# EAGLE board ShiftIn (EAGLE 9.6.2)
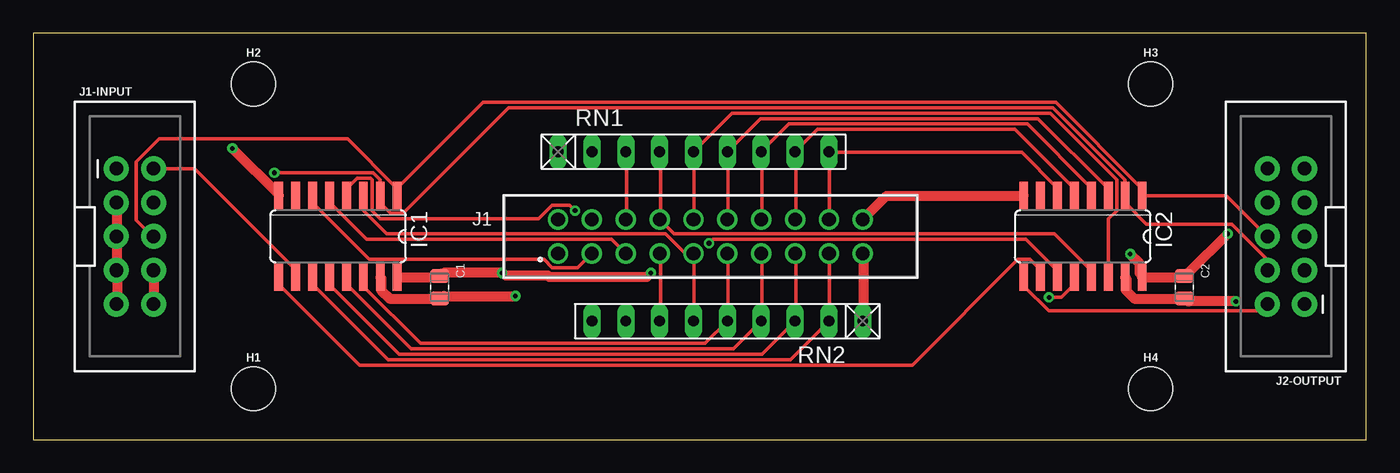
[diagram p0: board, top side]
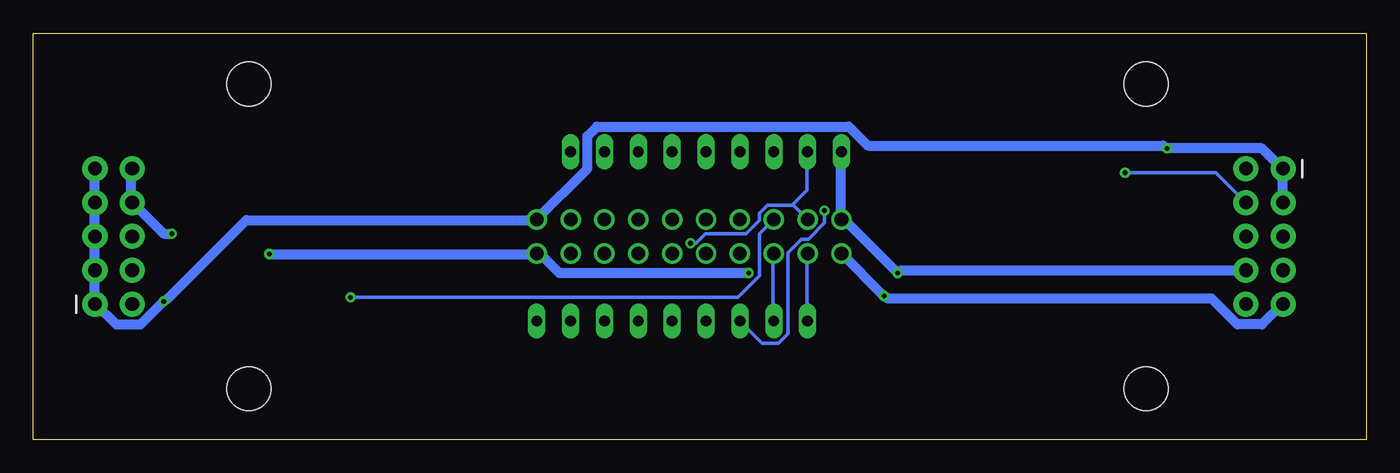
[diagram p1: board, bottom side, seen from below]

Size 100 x 30.47 mm. Coordinates in mm from the lower left corner, seen from the top.
Outline: 0,0 100,0 100,30.47 0,30.47 0,0
Copper layers (1*16): Top 0.035mm / dielectric 1.5mm / Bottom 0.035mm
Design rules "default": minimum track width 6mil, minimum drill 0.35mm, track to track 6mil, track to pad 6mil, pad to pad 6mil, via to via 6mil, smd to smd 6mil, copper to edge 40mil, drill to drill 6mil, minimum pad ring 10mil, minimum via ring 8mil, stop-mask expansion 4mil, vias tented up to drill 0mil, thermal gap 10mil
Net classes: 0 default: width 0.254 mm; 1 power: width 0.762 mm

## Footprints (pad centres in the part's own frame; a part is rotated, then mirrored left to right if it is on the bottom)
CAP_0805 = smd 1.05 x 1.38: 1 -0.84,0; 2 0.84,0
STAND-OFF = hole 3.302: 0,0
SO16 = smd 0.66 x 2.032: 1 -4.445,-3.073; 2 -3.175,-3.073; 3 -1.905,-3.073; 4 -0.635,-3.073; 5 0.635,-3.073; 6 1.905,-3.073; 7 3.175,-3.073; 8 4.445,-3.073; 9 4.445,3.073; 10 3.175,3.073; 11 1.905,3.073; 12 0.635,3.073; 13 -0.635,3.073; 14 -1.905,3.073; 15 -3.175,3.073; 16 -4.445,3.073
61202022323 = drill 1.02: 1 -11.43,-1.27; 2 -11.43,1.27; 3 -8.89,-1.27; 4 -8.89,1.27; 5 -6.35,-1.27; 6 -6.35,1.27; 7 -3.81,-1.27; 8 -3.81,1.27; 9 -1.27,-1.27; 10 -1.27,1.27; 11 1.27,-1.27; 12 1.27,1.27; 13 3.81,-1.27; 14 3.81,1.27; 15 6.35,-1.27; 16 6.35,1.27; 17 8.89,-1.27; 18 8.89,1.27; 19 11.43,-1.27; 20 11.43,1.27
2X5-SHROUDED_LOCK = drill 1.016 pad 1.88: 1 -1.397,5.08; 2 1.397,5.08; 3 -1.397,2.54; 4 1.397,2.54; 5 -1.397,0; 6 1.397,0; 7 -1.397,-2.54; 8 1.397,-2.54; 9 -1.397,-5.08; 10 1.397,-5.08
RN-9 = drill 0.813 long: 1 -10.16,0; 2 -7.62,0; 3 -5.08,0; 4 -2.54,0; 5 0,0; 6 2.54,0; 7 5.08,0; 8 7.62,0; 9 10.16,0

## Placement (x,y rotation side)
C1  CC0805KRX7R9BB104  [CAP_0805]  30.48,11.43 270 top
C2  CC0805KRX7R9BB104  [CAP_0805]  86.36,11.43 270 top
H1  STAND-OFF  [STAND-OFF]  16.51,3.81 0 top
H2  STAND-OFF  [STAND-OFF]  16.51,26.67 0 top
H3  STAND-OFF  [STAND-OFF]  83.82,26.67 0 top
H4  STAND-OFF  [STAND-OFF]  83.82,3.81 0 top
IC1  74HC165D  [SO16]  22.86,15.24 180 top
IC2  74HC165D  [SO16]  78.74,15.24 180 top
J1  61202022323  [61202022323]  50.8,15.24 0 top
J1-INPUT  [2X5-SHROUDED_LOCK]  7.62,15.24 0 top
J2-OUTPUT  [2X5-SHROUDED_LOCK]  93.98,15.24 180 top
RN1  10k  [RN-9]  49.53,21.59 0 top
RN2  10k  [RN-9]  52.07,8.89 180 top

## Library data of the parts
C1 C2 = Resistor_Capacitor; CREATED_BY: PCBLayout.com; DIGIKEY_PART_NUMBER: 311-1140-2-ND; MANUFACTURER: Yageo; MPN: CC0805KRX7R9BB104; PACKAGE: SMD 0805
H1-H4 = SparkFun-Hardware
IC1 IC2 = 74xx-eu
J1 = Wurth_Connectors_WR-BHD; CONTACT-RESISTANCE: 20mOhm; DATASHEET-URL: https://www.we-online.com/catalog/datasheet/61202022323.pdf; GENDER: Transition; IR: 1A; L: 30.85mm; MOUNT: THT; PACKAGING: Tray; PART-NUMBER: 61202022323; PINS: 20; PITCH: 2.54mm; TYPE: Straight; WORKING-VOLTAGE: 250V(AC)
J1-INPUT J2-OUTPUT = SparkFun-Connectors; PROD_ID: CONN-08671; SF_ID: PRT-08506
RN1 RN2 = resistor-net; OC_FARNELL: unknown; OC_NEWARK: unknown

## Nets
GND [power]: C1.2 C2.2 IC1.8 IC1.15 IC2.8 IC2.15 J1-INPUT.1 J1-INPUT.3 J1-INPUT.5 J1-INPUT.7 J1-INPUT.9 J1.1 J1.20 J2-OUTPUT.1 J2-OUTPUT.3 J2-OUTPUT.5 J2-OUTPUT.7 J2-OUTPUT.9
N$1: IC1.2 IC2.2 J1-INPUT.4 J2-OUTPUT.4
N$2: IC1.9 IC2.10
N$3: IC1.10 J1-INPUT.2
N$4: IC1.11 J1.17 RN2.2
N$6: IC2.9 J2-OUTPUT.2
N$7: IC1.12 J1.15 RN2.3
N$8: IC1.13 J1.13 RN2.4
N$9: IC1.14 J1.11 RN2.5
N$10: IC1.3 J1.9 RN2.6
N$11: IC1.4 J1.7 RN2.7
N$12: IC1.5 J1.5 RN2.8
N$13: IC1.6 J1.3 RN2.9
N$14: IC2.11 J1.4 RN1.2
N$15: IC2.12 J1.6 RN1.3
N$16: IC2.13 J1.8 RN1.4
N$17: IC2.14 J1.10 RN1.5
N$18: IC2.3 J1.12 RN1.6
N$19: IC2.4 J1.14 RN1.7
N$20: IC2.5 J1.16 RN1.8
N$21: IC2.6 J1.18 RN1.9
N$22: IC1.1 IC2.1 J1-INPUT.6 J2-OUTPUT.6
VCC [power]: C1.1 C2.1 IC1.16 IC2.16 J1-INPUT.8 J1-INPUT.10 J1.2 J1.19 J2-OUTPUT.8 J2-OUTPUT.10 RN1.1 RN2.1

## Tracks (layer width: path | path; a pad name or v marks a point on that pad's centre or on a via)
GND  (via drill 0.35)
  Top 0.762: IC1.15 26.11,12.09 26.11,11.18 26.72,10.57 30.48,10.57 C1.2 30.79,10.77 v36.17,10.77 | J1-INPUT.9 6.3,10.16 6.3,12.7 J1-INPUT.7 6.3,13.01 6.3,15.24 J1-INPUT.5 6.3,15.54 6.3,17.78 J1-INPUT.3 | v14.94,21.84 18.39,18.39 IC1.8 | J1.20 64.01,18.29 74.27,18.29 IC2.8 | IC2.15 81.99,12.09 81.99,11.18 82.6,10.57 86.36,10.57 C2.2 86.67,10.36 v90.22,10.36
  Bottom 0.762: J1.1 v36.17,10.77 35.87,10.57 11.58,10.57 9.65,8.64 7.82,8.64 6.3,10.16 J1-INPUT.9 | J1-INPUT.3 6.3,17.78 6.3,20.02 J1-INPUT.1 6.3,20.32 7.82,21.84 v14.94,21.84 15.24,22.05 37.39,22.05 38.81,23.47 57.71,23.47 58.42,22.76 58.42,20.32 J1.20 62.28,16.46 84.02,16.46 89.92,10.57 v90.22,10.36 91.95,8.64 93.78,8.64 95.3,10.16 J2-OUTPUT.1 95.4,10.46 95.4,12.7 J2-OUTPUT.3 95.4,13.01 95.4,15.24 J2-OUTPUT.5 95.4,15.54 95.4,17.78 J2-OUTPUT.7 95.4,18.09 95.4,20.32 J2-OUTPUT.9
N$1  (via drill 0.35)
  Top 0.254: J2-OUTPUT.4 92.56,12.7 92.56,13.51 89.92,16.15 83.52,16.15 81.99,17.68 81.99,18.29 IC2.2 81.89,18.39 81.89,19.51 76.5,24.89 35.66,24.89 27.74,16.97 26.82,16.97 26.01,17.78 26.01,18.19 IC1.2 26.01,18.39 26.01,19.51 25.5,20.02 v18.09,20.02
  Bottom 0.254: v18.09,20.02 11.28,20.02 9.04,17.78 J1-INPUT.4
N$2
  Top 0.254: IC1.9 18.49,12.09 18.49,11.58 24.49,5.59 65.94,5.59 73.86,13.51 74.78,13.51 75.49,12.8 75.49,12.19 IC2.10
N$3
  Top 0.254: J1-INPUT.2 12.09,20.32 19.61,12.8 19.61,12.19 IC1.10
N$4
  Top 0.254: IC1.11 21.03,12.09 21.03,11.58 26.62,5.99 56.79,5.99 RN2.2 59.74,8.94 59.74,13.92 J1.17
N$6
  Top 0.254: IC2.9 74.37,12.09 74.37,11.48 76.2,9.65 92.05,9.65 92.56,10.16 J2-OUTPUT.2
N$7
  Top 0.254: IC1.12 22.25,12.09 22.25,11.58 27.43,6.4 54.66,6.4 RN2.3 57.2,8.94 57.2,13.92 J1.15
N$8
  Top 0.254: IC1.13 23.57,12.09 23.57,11.58 28.35,6.81 52.53,6.81 RN2.4 54.66,8.94 54.66,13.92 J1.13
N$9
  Top 0.254: IC1.14 24.79,12.09 24.79,11.48 29.06,7.21 50.39,7.21 RN2.5 52.12,8.94 52.12,13.92 J1.11
N$10
  Top 0.254: IC1.3 24.79,18.29 24.79,17.17 26.52,15.44 47.45,15.44 48.87,14.02 49.48,14.02 J1.9 49.58,13.92 49.58,8.94 RN2.6
N$11  (via drill 0.35)
  Top 0.254: v40.64,17.17 40.23,17.58 38.91,17.58 37.9,16.56 26.01,16.56 25.4,17.17 25.4,19.51 25.3,19.61 24.28,19.61 23.57,18.9 23.57,18.39 IC1.4 | J1.7 47.04,13.92 47.04,8.94 RN2.7
  Bottom 0.254: v40.64,17.17 40.64,16.26 41.86,15.04 42.37,15.04 43.38,14.02 43.38,7.92 44.09,7.21 45.31,7.21 RN2.7
N$12
  Top 0.254: J1.5 43.38,15.04 24.99,15.04 22.25,17.78 22.25,18.29 IC1.5
  Bottom 0.254: RN2.8 44.5,8.94 44.5,13.92 J1.5
N$13
  Top 0.254: J1.3 40.84,12.9 38.91,12.9 38.3,13.51 25.2,13.51 21.03,17.68 21.03,18.29 IC1.6
  Bottom 0.254: RN2.9 41.96,8.94 41.96,13.92 J1.3
N$14  (via drill 0.35)
  Top 0.254: v50.7,14.73 51,15.04 74.47,15.04 76.81,12.7 76.81,12.19 IC2.11
  Bottom 0.254: v50.7,14.73 50.29,14.73 49.58,15.44 46.53,15.44 45.52,16.46 45.52,16.97 44.91,17.58 42.98,17.58 | J1.4 42.98,17.58 | RN1.2 41.96,21.54 41.96,18.69 42.98,17.68 42.98,17.58
N$15  (via drill 0.35)
  Top 0.254: v76.2,10.67 77.11,10.67 78.03,11.58 78.03,12.09 IC2.12 | RN1.3 44.5,21.54 44.5,16.56 J1.6
  Bottom 0.254: v76.2,10.67 47.14,10.67 45.52,12.29 45.52,15.44 J1.6
N$16
  Top 0.254: IC2.13 79.35,12.19 79.35,12.7 76.61,15.44 48.06,15.44 J1.8 47.04,16.56 47.04,21.54 RN1.4
N$17
  Top 0.254: IC2.14 80.67,12.19 80.67,16.56 81.28,17.17 81.28,19.51 76.3,24.49 52.43,24.49 RN1.5 49.58,21.54 49.58,16.56 J1.10
N$18
  Top 0.254: IC2.3 80.57,18.39 80.57,18.9 75.39,24.08 54.56,24.08 RN1.6 52.12,21.54 52.12,16.56 J1.12
N$19
  Top 0.254: IC2.4 79.35,18.39 79.35,18.9 74.57,23.67 56.69,23.67 RN1.7 54.66,21.54 54.66,16.56 J1.14
N$20
  Top 0.254: IC2.5 78.03,18.39 78.03,18.9 73.66,23.27 58.83,23.27 RN1.8 57.2,21.54 57.2,16.56 J1.16
N$21
  Top 0.254: IC2.6 76.81,18.39 76.81,18.9 74.17,21.54 59.74,21.54 RN1.9 59.74,21.44 59.74,16.56 J1.18
N$22
  Top 0.254: J2-OUTPUT.6 92.56,15.24 89.51,18.29 83.21,18.29 IC2.1 83.11,18.39 83.11,18.9 76.71,25.3 33.73,25.3 27.33,18.9 IC1.1 27.23,18.39 27.23,18.9 23.57,22.55 9.45,22.55 7.72,20.83 7.72,16.46 8.94,15.24 J1-INPUT.6
VCC  (via drill 0.35)
  Top 0.762: J1-INPUT.10 9.04,10.16 9.04,12.7 J1-INPUT.8 | IC1.16 27.33,12.19 30.48,12.19 C1.1 30.79,12.5 v35.15,12.5 35.46,12.29 38.61,12.29 38.71,12.19 46.02,12.19 v46.33,12.5 | RN2.1 62.28,8.94 62.28,13.92 J1.19 | v89.61,15.44 86.67,12.5 C2.1 86.36,12.19 83.21,12.19 IC2.16 83.01,12.5 83.01,13.21 v82.3,13.92
  Bottom 0.762: RN1.1 39.42,21.54 39.42,16.56 J1.2 39.01,16.36 v35.15,12.5 34.85,12.7 J1-INPUT.8 | v89.61,15.44 90.22,15.44 92.56,17.78 J2-OUTPUT.8 92.66,18.09 92.66,20.32 J2-OUTPUT.10 | v82.3,13.92 62.28,13.92 J1.19 61.87,13.82 60.55,12.5 v46.33,12.5